# EAGLE board Schematic v30 (EAGLE 9.7.0)
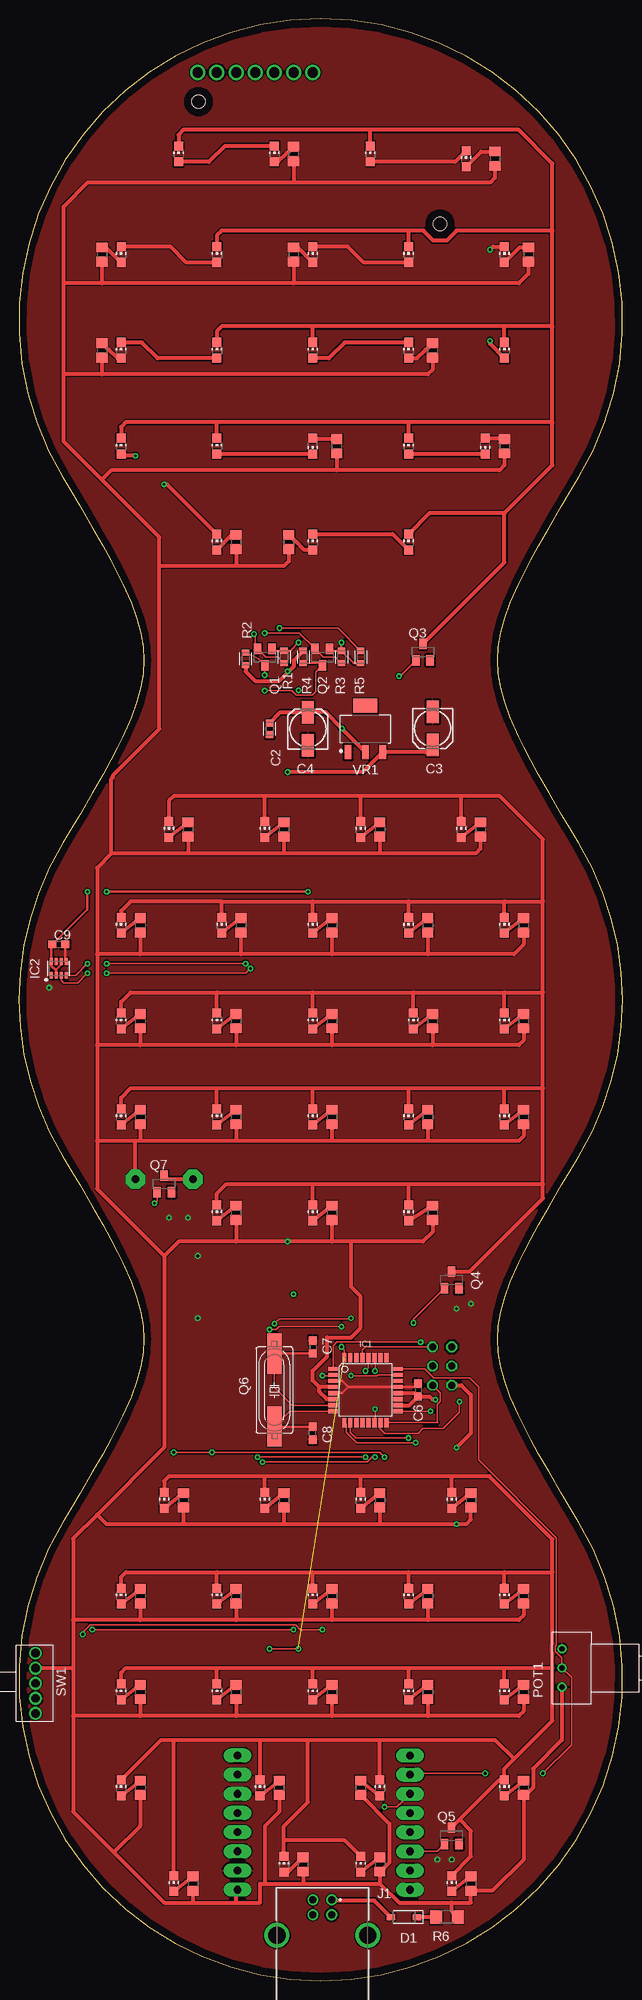
[diagram p0: board, top side]
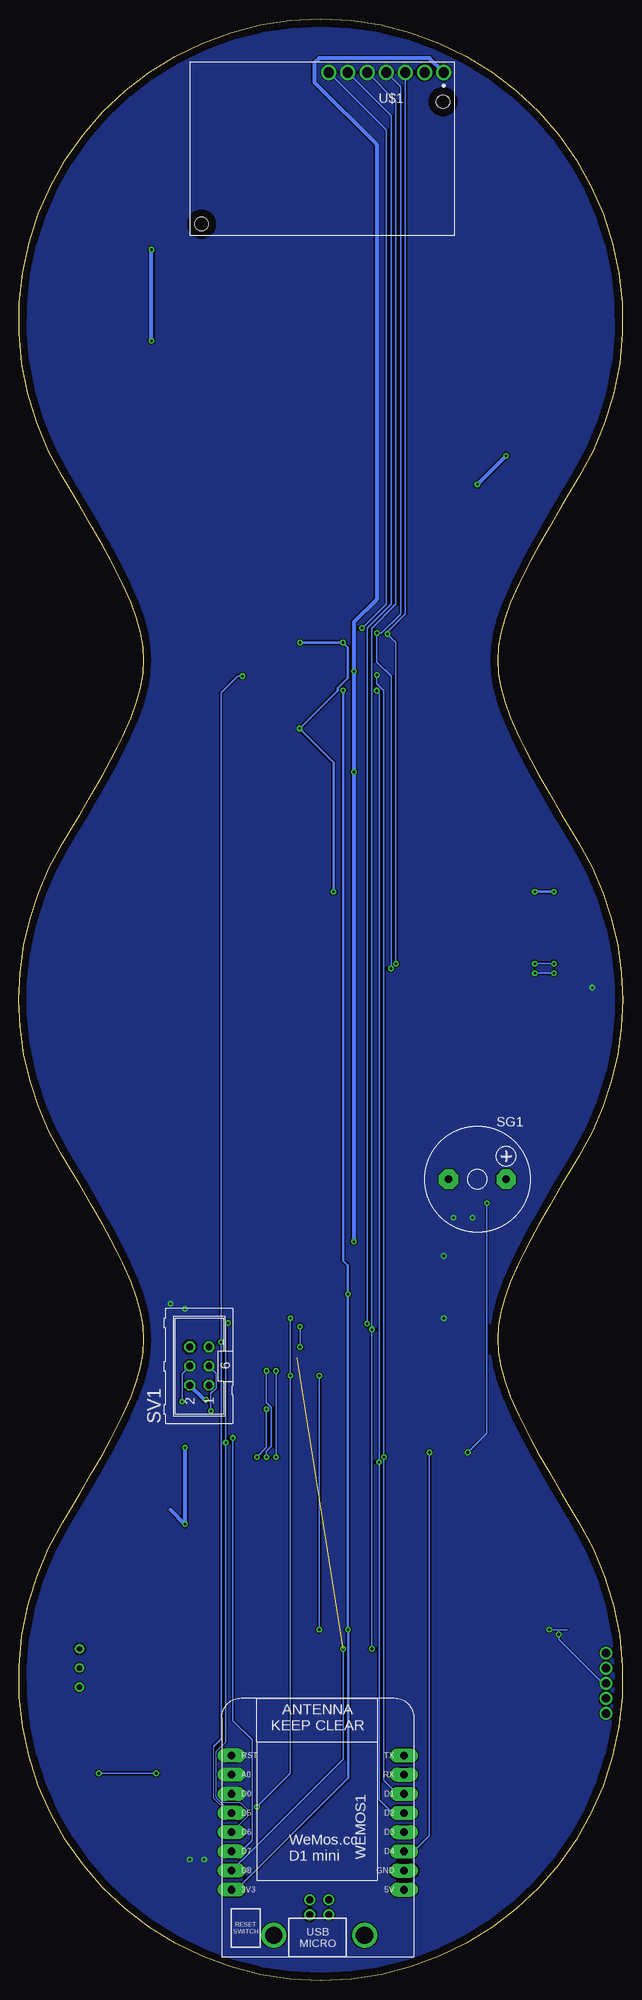
[diagram p1: board, bottom side, seen from below]

Size 80 x 260 mm. Coordinates in mm from the lower left corner, seen from the top.
Outline: 5.8,199.26 7,197.26 8.05,195.51 9.75,192.59 11.1,190.22 12.17,188.25 13.04,186.57 13.76,185.1 14.87,182.61 15.64,180.49 16.16,178.57 16.46,176.77 16.56,175 16.46,173.24 16.16,171.43 15.64,169.51 14.87,167.39 13.76,164.9 13.04,163.43 12.17,161.75 11.09,159.78 9.76,157.41 8.04,154.49 7,152.74 5.8,150.74 arc62 5.8,109.26 7,107.26 8.05,105.51 9.75,102.59 11.1,100.22 12.17,98.25 13.04,96.57 13.76,95.1 14.87,92.61 15.64,90.49 16.16,88.57 16.46,86.77 16.56,85 16.46,83.24 16.16,81.43 15.64,79.51 14.87,77.39 13.76,74.9 13.04,73.43 12.17,71.75 11.09,69.78 9.76,67.41 8.04,64.49 7,62.74 5.8,60.74 arc242 74.2,60.74 73,62.74 71.96,64.49 70.24,67.41 68.91,69.78 67.83,71.75 66.96,73.43 66.24,74.9 65.13,77.39 64.36,79.51 63.84,81.43 63.54,83.24 63.44,85 63.54,86.77 63.84,88.57 64.36,90.49 65.13,92.61 66.24,95.1 66.96,96.57 67.83,98.25 68.9,100.22 70.25,102.59 71.95,105.51 73,107.26 74.2,109.26 arc62 74.2,150.74 73,152.74 71.96,154.49 70.24,157.41 68.91,159.78 67.83,161.75 66.96,163.43 66.24,164.9 65.13,167.39 64.36,169.51 63.84,171.43 63.54,173.24 63.44,175 63.54,176.77 63.84,178.57 64.36,180.49 65.13,182.61 66.24,185.1 66.96,186.57 67.83,188.25 68.9,190.22 70.25,192.59 71.95,195.51 73,197.26 74.2,199.26 arc242 5.8,199.26
Copper layers (1*16): Top 0.035mm / dielectric 1.5mm / Bottom 0.035mm
Design rules "default *": minimum track width 6mil, minimum drill 0.35mm, track to track 6mil, track to pad 6mil, pad to pad 6mil, via to via 6mil, smd to smd 6mil, copper to edge 40mil, drill to drill 6mil, minimum pad ring 10mil, minimum via ring 8mil, stop-mask expansion 4mil, vias tented up to drill 0.4mm, thermal gap 10mil
Net classes: 0 default: width 0.152 mm; 1 low_power: width 0.305 mm; 2 high_power: width 0.508 mm

## Footprints (pad centres in the part's own frame; a part is rotated, then mirrored left to right if it is on the bottom)
CAPC1608X85 = smd 0.921 x 0.97: 1 -0.775,0; 2 0.775,0
153CLV-0505 = smd 3 x 1.6: + 2.2,0; - -2.2,0
C0603 = smd 1.1 x 1: 1 -0.85,0; 2 0.85,0
SOD3715X135 = smd 1.127 x 0.784: 1 -1.722,0; 2 1.722,0
TQFP32-08 = smd 1.27 x 0.559: 1 -4.293,2.8; 2 -4.293,2; 3 -4.293,1.2; 4 -4.293,0.4; 5 -4.293,-0.4; 6 -4.293,-1.2; 7 -4.293,-2; 8 -4.293,-2.8; 17 4.293,-2.8; 18 4.293,-2; 19 4.293,-1.2; 20 4.293,-0.4; 21 4.293,0.4; 22 4.293,1.2; 23 4.293,2; 24 4.293,2.8 | smd 0.559 x 1.27: 9 -2.8,-4.293; 10 -2,-4.293; 11 -1.2,-4.293; 12 -0.4,-4.293; 13 0.4,-4.293; 14 1.2,-4.293; 15 2,-4.293; 16 2.8,-4.293; 25 2.8,4.293; 26 2,4.293; 27 1.2,4.293; 28 0.4,4.293; 29 -0.4,4.293; 30 -1.2,4.293; 31 -2,4.293; 32 -2.8,4.293
SON65P200X250X95-8N = smd 0.879 x 0.382: 1 -0.916,0.975; 2 -0.916,0.325; 3 -0.916,-0.325; 4 -0.916,-0.975; 5 0.916,-0.975; 6 0.916,-0.325; 7 0.916,0.325; 8 0.916,0.975
61400416121 = drill 0.92: 1 1.25,6.74; 2 -1.25,6.74; 3 -1.25,4.74; 4 1.25,4.74 | drill 2.3: S1 -6.02,2.03; S2 6.02,2.03
CHIP-LED0805 = smd 1.2 x 1.2: A 0,-1.05; C 0,1.05
3310C-001-503L = drill 0.71: 1 2.54,0; 2 0,0; 3 -2.54,0
SOT23 = smd 1 x 1.4: 1 -0.95,-1.1; 2 0.95,-1.1; 3 0,1.1
HC49UP = smd 5.334 x 1.93: 1 -4.826,0; 2 4.826,0
RESC1608X60 = smd 0.799 x 0.974: 1 -0.815,0; 2 0.815,0
R1206 = smd 1.6 x 1.803: 1 -1.422,0; 2 1.422,0
R0805 = smd 1.3 x 1.5: 1 -0.95,0; 2 0.95,0
F/CM12P = drill 1.016 pad 2.54 octagon: + 3.81,0; - -3.81,0
ML6 = drill 0.914 octagon: 1 -2.54,-1.27; 2 -2.54,1.27; 3 0,-1.27; 4 0,1.27; 5 2.54,-1.27; 6 2.54,1.27
HDRRAR5W64P200_1X5_1016X736X556B = drill 1.105 pad 1.705: 1 0,0; 2 2,0; 3 4,0; 4 6,0; 5 8,0
HDRV7W80P254_1X7_1778X254X838B = drill 1.331 pad 1.997: 1 0,0; 2 2.54,0; 3 5.08,0; 4 7.62,0; 5 10.16,0; 6 12.7,0; 7 15.24,0 | hole 1.8: 0.1,3.875; 32.1,20.1
SOT230P700X170-4 = smd 1.86 x 0.898: 1 -3.075,2.3; 2 -3.075,0; 3 -3.075,-2.3 | smd 1.86 x 3.189: 4 3.075,0
HDRVR8W64P254_1X8_2032X254X850B = drill 1.016 pad 1.829 long: 3V3 0,0; 5V 0,-22.86; A0 15.24,0; D0 12.7,0; D1 12.7,-22.86; D2 10.16,-22.86; D3 7.62,-22.86; D4 5.08,-22.86; D5 10.16,0; D6 7.62,0; D7 5.08,0; D8 2.54,0; GND 2.54,-22.86; RESET 17.78,0; RX 15.24,-22.86; TX 17.78,-22.86

## Placement (x,y rotation side)
C2  100nF  [CAPC1608X85]  33.22,165.9 270 top
C3  10uF  [153CLV-0505]  54.81,165.97 270 top
C4  10uF  [153CLV-0505]  38.3,165.9 90 top
C6  100nF  [C0603]  52.91,78.27 270 top
C7  22pF  [C0603]  38.94,83.99 270 top
C8  22pF  [C0603]  38.94,72.56 90 top
C9  100nF  [C0603]  5.28,137.33 0 top
D1  1N4448W  [SOD3715X135]  51,8.42 180 top
IC1  ATMEGA328P  [TQFP32-08]  45.92,78.27 0 top
IC2  BMP280  [SON65P200X250X95-8N]  5.28,134.15 90 top
J1  61400416121  [61400416121]  40.21,3.98 0 top
LED_G1  [CHIP-LED0805]  57.35,12.87 0 top
LED_G2  [CHIP-LED0805]  45.29,15.41 0 top
LED_G3  [CHIP-LED0805]  35.13,15.41 0 top
LED_G4  [CHIP-LED0805]  20.52,12.87 0 top
LED_G5  [CHIP-LED0805]  64.34,25.57 0 top
LED_G6  [CHIP-LED0805]  47.83,25.57 0 top
LED_G7  [CHIP-LED0805]  31.95,25.57 0 top
LED_G8  [CHIP-LED0805]  13.54,25.57 0 top
LED_G9  [CHIP-LED0805]  64.34,38.27 0 top
LED_G10  [CHIP-LED0805]  51.64,38.27 0 top
LED_G11  [CHIP-LED0805]  38.94,38.27 0 top
LED_G12  [CHIP-LED0805]  26.24,38.27 0 top
LED_G13  [CHIP-LED0805]  13.54,38.27 0 top
LED_G14  [CHIP-LED0805]  64.34,50.97 0 top
LED_G15  [CHIP-LED0805]  51.64,50.97 0 top
LED_G16  [CHIP-LED0805]  38.94,50.97 0 top
LED_G17  [CHIP-LED0805]  26.24,50.97 0 top
LED_G18  [CHIP-LED0805]  13.54,50.97 0 top
LED_G19  [CHIP-LED0805]  57.35,63.67 0 top
LED_G20  [CHIP-LED0805]  45.29,63.67 0 top
LED_G21  [CHIP-LED0805]  32.59,63.67 0 top
LED_G22  [CHIP-LED0805]  19.25,63.67 0 top
LED_R1  [CHIP-LED0805]  51.64,190.67 0 top
LED_R2  [CHIP-LED0805]  38.94,190.67 0 top
LED_R3  [CHIP-LED0805]  13.54,203.37 0 top
LED_R4  [CHIP-LED0805]  26.24,190.67 0 top
LED_R5  [CHIP-LED0805]  26.24,203.37 0 top
LED_R6  [CHIP-LED0805]  38.94,203.37 180 top
LED_R7  [CHIP-LED0805]  51.64,203.37 0 top
LED_R8  [CHIP-LED0805]  61.8,203.37 180 top
LED_R9  [CHIP-LED0805]  26.24,216.07 0 top
LED_R10  [CHIP-LED0805]  13.54,216.07 0 top
LED_R11  [CHIP-LED0805]  38.94,216.07 0 top
LED_R12  [CHIP-LED0805]  51.64,216.07 0 top
LED_R13  [CHIP-LED0805]  64.34,216.07 0 top
LED_R14  [CHIP-LED0805]  64.34,228.77 0 top
LED_R15  [CHIP-LED0805]  51.64,228.77 0 top
LED_R16  [CHIP-LED0805]  38.94,228.77 0 top
LED_R17  [CHIP-LED0805]  26.24,228.77 0 top
LED_R18  [CHIP-LED0805]  13.54,228.77 0 top
LED_R19  [CHIP-LED0805]  21.16,242.1 0 top
LED_R20  [CHIP-LED0805]  33.86,242.1 0 top
LED_R21  [CHIP-LED0805]  46.56,242.1 0 top
LED_R22  [CHIP-LED0805]  59.26,241.47 0 top
LED_Y1  [CHIP-LED0805]  51.64,101.77 0 top
LED_Y2  [CHIP-LED0805]  38.94,101.77 0 top
LED_Y3  [CHIP-LED0805]  26.24,101.77 0 top
LED_Y4  [CHIP-LED0805]  64.34,114.47 0 top
LED_Y5  [CHIP-LED0805]  51.64,114.47 0 top
LED_Y6  [CHIP-LED0805]  38.94,114.47 0 top
LED_Y7  [CHIP-LED0805]  26.24,114.47 0 top
LED_Y8  [CHIP-LED0805]  13.54,114.47 0 top
LED_Y9  [CHIP-LED0805]  64.34,127.17 0 top
LED_Y10  [CHIP-LED0805]  52.27,127.17 0 top
LED_Y11  [CHIP-LED0805]  38.94,127.17 0 top
LED_Y12  [CHIP-LED0805]  26.24,127.17 0 top
LED_Y13  [CHIP-LED0805]  13.54,127.17 0 top
LED_Y14  [CHIP-LED0805]  64.34,139.87 0 top
LED_Y15  [CHIP-LED0805]  51.64,139.87 0 top
LED_Y16  [CHIP-LED0805]  38.94,139.87 0 top
LED_Y17  [CHIP-LED0805]  26.87,139.87 0 top
LED_Y18  [CHIP-LED0805]  13.54,139.87 0 top
LED_Y19  [CHIP-LED0805]  58.62,152.57 0 top
LED_Y20  [CHIP-LED0805]  45.29,152.57 0 top
LED_Y21  [CHIP-LED0805]  32.59,152.57 0 top
LED_Y22  [CHIP-LED0805]  19.89,152.57 0 top
POT1  3310C-001-503L  [3310C-001-503L]  71.96,41.44 90 top
Q1  NMOSFET  [SOT23]  32.59,175.43 180 top
Q2  NMOSFET  [SOT23]  40.21,175.43 180 top
Q3  NMOSFET  [SOT23]  53.54,176.06 0 top
Q4  NMOSFET  [SOT23]  57.35,92.88 0 top
Q5  NMOSFET  [SOT23]  57.35,19.22 0 top
Q6  16MHz  [HC49UP]  33.86,78.27 90 top
Q7  NMOSFET  [SOT23]  19.25,105.58 0 top
R1  10k  [RESC1608X60]  35.13,175.43 90 top
R2  10k  [RESC1608X60]  30.05,175.19 270 top
R3  10k  [RESC1608X60]  42.75,175.43 90 top
R4  10k  [RESC1608X60]  37.67,175.43 90 top
R5  DNP  [RESC1608X60]  45.29,175.43 90 top
R6  [R1206]  56.72,8.42 0 top
R_G1  [R0805]  59.89,12.87 270 top
R_G2  [R0805]  47.83,15.41 270 top
R_G3  [R0805]  37.67,15.41 270 top
R_G4  [R0805]  23.06,12.87 270 top
R_G5  [R0805]  66.88,25.57 270 top
R_G6  [R0805]  45.29,25.57 270 top
R_G7  [R0805]  34.49,25.57 270 top
R_G8  [R0805]  16.08,25.57 270 top
R_G9  [R0805]  66.88,38.27 270 top
R_G10  [R0805]  54.18,38.27 270 top
R_G11  [R0805]  41.48,38.27 270 top
R_G12  [R0805]  28.78,38.27 270 top
R_G13  [R0805]  16.08,38.27 270 top
R_G14  [R0805]  66.88,50.97 270 top
R_G15  [R0805]  54.18,50.97 270 top
R_G16  [R0805]  41.48,50.97 270 top
R_G17  [R0805]  28.78,50.97 270 top
R_G18  [R0805]  16.08,50.97 270 top
R_G19  [R0805]  59.89,63.67 270 top
R_G20  [R0805]  47.83,63.67 270 top
R_G21  [R0805]  35.13,63.67 270 top
R_G22  [R0805]  21.79,63.67 270 top
R_R1  [R0805]  35.76,190.67 270 top
R_R2  [R0805]  28.78,190.67 270 top
R_R3  [R0805]  42.11,203.37 270 top
R_R4  [R0805]  64.34,203.37 270 top
R_R5  [R0805]  11,216.07 270 top
R_R6  [R0805]  54.81,216.07 270 top
R_R7  [R0805]  67.51,228.77 270 top
R_R8  [R0805]  36.4,228.77 270 top
R_R9  [R0805]  11,228.77 270 top
R_R10  [R0805]  36.4,242.1 270 top
R_R11  [R0805]  63.07,241.47 270 top
R_Y1  [R0805]  54.81,101.77 270 top
R_Y2  [R0805]  41.48,101.77 270 top
R_Y3  [R0805]  28.78,101.77 270 top
R_Y4  [R0805]  66.88,114.47 270 top
R_Y5  [R0805]  54.18,114.47 270 top
R_Y6  [R0805]  41.48,114.47 270 top
R_Y7  [R0805]  28.78,114.47 270 top
R_Y8  [R0805]  16.08,114.47 270 top
R_Y9  [R0805]  66.88,127.17 270 top
R_Y10  [R0805]  54.81,127.17 270 top
R_Y11  [R0805]  41.48,127.17 270 top
R_Y12  [R0805]  28.78,127.17 270 top
R_Y13  [R0805]  16.08,127.17 270 top
R_Y14  [R0805]  66.88,139.87 270 top
R_Y15  [R0805]  54.18,139.87 270 top
R_Y16  [R0805]  41.48,139.87 270 top
R_Y17  [R0805]  29.41,139.87 270 top
R_Y18  [R0805]  16.08,139.87 270 top
R_Y19  [R0805]  61.16,152.57 270 top
R_Y20  [R0805]  47.83,152.57 270 top
R_Y21  [R0805]  35.13,152.57 270 top
R_Y22  [R0805]  22.43,152.57 270 top
SG1  F/CM12P  [F/CM12P]  19.25,106.21 0 bottom
SV1  [ML6]  56.08,81.45 90 bottom
SW1  SWITCH_1X1  [HDRRAR5W64P200_1X5_1016X736X556B]  2.2,43.41 270 top
U$1  SDC30  [HDRV7W80P254_1X7_1778X254X838B]  23.7,252.9 180 bottom
VR1  NCP1117ST33T3G  [SOT230P700X170-4]  45.92,165.9 90 top
WEMOS1  WEMOS_D1_MINI  [HDRVR8W64P254_1X8_2032X254X850B]  51.83,12.05 90 bottom

## Library data of the parts
C2 = Capacitor; CATEGORY: Capacitor
C3 C4 C6-C9 = rcl; SPICEPREFIX: C
D1 = Diode; CATEGORY: Diode; DESCRIPTION: DIODE GEN PURP 75V 250MA SOD123; MANUFACTURER: Micro Commercial Co; SUB-CATEGORY: Rectifier
IC1 = IC_Embedded; CATEGORY: IC_Embedded; MANUFACTURER: Microchip Technologies; MPN: ATmega328P-AU; OPERATING_TEMP: –40 to +105°C; PART_STATUS: Active; SUB-CATEGORY: Microcontroller
IC2 U$1 = SCD30
J1 = Wurth_Connectors_WR-USB; APPLICATION: USB 2.0; DATASHEET-URL: https://www.we-online.com/catalog/datasheet/61400416121.pdf; GERDER: Female; INTERFACE-TYPE: Type B; IR1: 1.5A; MOUNT: THT; PACKAGING: Tray; PART-NUMBER: 61400416121; PINS: 4; TYPE: Horizontal; WORKING-VOLTAGE: 30V(AC)
LED_G1-LED_G22 LED_R1-LED_R22 LED_Y1-LED_Y22 = led
POT1 = Potentiometer_Trimmers; CREATED_BY: PCBLayout.com; DIGIKEY_PARTNO: 3310C-001-503L-ND; MANUFACTURER: Bourns Inc.; MPN: 3310C-001-503L
Q1-Q5 Q7 = Transistor; CATEGORY: Transistor; SUB-CATEGORY: MOSFET; TYPE: N-Channel
Q6 = crystal; OC_FARNELL: unknown; OC_NEWARK: unknown
R1-R5 = Resistor; CATEGORY: Resistor; SUB-CATEGORY: Fixed
R6 R_G1-R_G22 R_R1-R_R11 R_Y1-R_Y22 = rcl; SPICEPREFIX: R
SG1 = buzzer; OC_FARNELL: unknown; OC_NEWARK: unknown
SV1 = con-harting-ml; OC_FARNELL: unknown; OC_NEWARK: unknown
SW1 = Switches
VR1 = IC_Power-Management; CATEGORY: IC_Power-Management; MANUFACTURER: ON Semiconductor; MPN: NCP1117ST33T3G; OPERATING_TEMP: 0 to +125 °C; PART_STATUS: Active; ROHS_COMPLIANT: RoHS3 Compliant; SERIES: NCP1117, NCV1117; SUB-CATEGORY: Voltage Regulator; TYPE: Linear
WEMOS1 = Wemos D1 mini

## Nets
+2V5: C2.1 C4.+ C9.1 IC2.2 IC2.6 IC2.8 Q1.1 Q2.1 R1.2 R3.2 R5.1 VR1.2
+3V3: WEMOS1.3V3
+5V [high_power]: C3.+ C6.2 IC1.4 IC1.6 IC1.18 IC1.20 POT1.3 R2.2 R4.2 R6.2 R_G1.2 R_G2.2 R_G3.2 R_G4.2 R_G5.2 R_G6.2 R_G7.2 R_G8.2 R_G9.2 R_G10.2 R_G11.2 R_G12.2 R_G13.2 R_G14.2 R_G15.2 R_G16.2 R_G17.2 R_G18.2 R_G19.2 R_G20.2 R_G21.2 R_G22.2 R_R1.2 R_R2.2 R_R3.2 R_R4.2 R_R5.2 R_R6.2 R_R7.2 R_R8.2 R_R9.2 R_R10.2 R_R11.2 R_Y1.2 R_Y2.2 R_Y3.2 R_Y4.2 R_Y5.2 R_Y6.2 R_Y7.2 R_Y8.2 R_Y9.2 R_Y10.2 R_Y11.2 R_Y12.2 R_Y13.2 R_Y14.2 R_Y15.2 R_Y16.2 R_Y17.2 R_Y18.2 R_Y19.2 R_Y20.2 R_Y21.2 R_Y22.2 SG1.+ SV1.2 SW1.2 U$1.1 VR1.3 WEMOS1.5V
/RES: IC1.29 SV1.5
BRIGHTNESS: IC1.24 POT1.2 WEMOS1.A0
BUZZ_EN: IC1.2 SW1.3
BUZZER: IC1.14 Q7.1 WEMOS1.D4
GND: C2.2 C3.- C4.- C6.1 C7.1 C8.1 C9.2 IC1.3 IC1.5 IC1.21 IC2.1 IC2.5 IC2.7 J1.4 POT1.1 Q3.2 Q4.2 Q5.2 Q7.2 SV1.6 SW1.4 U$1.2 VR1.1 WEMOS1.GND
GREEN: IC1.10 Q5.1 WEMOS1.D7
MISO: IC1.16 SV1.1
MOSI: IC1.15 SV1.4
N$1: IC2.4 Q1.2 R1.1 U$1.3
N$2: LED_G1.A R_G1.1
N$3: R5.2 U$1.7
N$4: D1.2 J1.1
N$5: LED_R3.A LED_R4.C
N$6: IC2.3 Q2.2 R3.1 U$1.4
N$7: LED_R4.A R_R2.1
N$8: D1.1 R6.1
N$9: LED_R5.A LED_R6.C
N$10: LED_R1.C LED_R3.C LED_R5.C LED_R7.C LED_R9.C LED_R11.C LED_R13.C LED_R15.C LED_R17.C LED_R19.C LED_R21.C Q3.3
N$11: LED_Y1.C LED_Y2.C LED_Y3.C LED_Y4.C LED_Y5.C LED_Y6.C LED_Y7.C LED_Y8.C LED_Y9.C LED_Y10.C LED_Y11.C LED_Y12.C LED_Y13.C LED_Y14.C LED_Y15.C LED_Y16.C LED_Y17.C LED_Y18.C LED_Y19.C LED_Y20.C LED_Y21.C LED_Y22.C Q4.3
N$12: LED_G1.C LED_G2.C LED_G3.C LED_G4.C LED_G5.C LED_G6.C LED_G7.C LED_G8.C LED_G9.C LED_G10.C LED_G11.C LED_G12.C LED_G13.C LED_G14.C LED_G15.C LED_G16.C LED_G17.C LED_G18.C LED_G19.C LED_G20.C LED_G21.C LED_G22.C Q5.3
N$13: LED_Y1.A R_Y1.1
N$14: LED_R1.A LED_R2.C
N$15: LED_R2.A R_R1.1
N$16: LED_R6.A R_R3.1
N$17: C7.2 IC1.7 Q6.2
N$18: LED_R7.A LED_R8.C
N$19: LED_R8.A R_R4.1
N$20: C8.2 IC1.8 Q6.1
N$21: LED_R9.A LED_R10.C
N$22: LED_R10.A R_R5.1
N$24: LED_R11.A LED_R12.C
N$25: LED_R12.A R_R6.1
N$27: LED_R13.A LED_R14.C
N$28: LED_R14.A R_R7.1
N$30: LED_R15.A LED_R16.C
N$31: LED_R16.A R_R8.1
N$32: Q7.3 SG1.-
N$33: LED_R17.A LED_R18.C
N$34: LED_R18.A R_R9.1
N$36: LED_R19.A LED_R20.C
N$37: LED_R20.A R_R10.1
N$39: LED_R21.A LED_R22.C
N$40: LED_R22.A R_R11.1
N$42: LED_Y2.A R_Y2.1
N$44: LED_Y3.A R_Y3.1
N$46: LED_Y4.A R_Y4.1
N$48: LED_Y5.A R_Y5.1
N$50: LED_Y6.A R_Y6.1
N$52: LED_Y7.A R_Y7.1
N$54: LED_Y8.A R_Y8.1
N$56: LED_Y9.A R_Y9.1
N$58: LED_Y10.A R_Y10.1
N$60: LED_Y11.A R_Y11.1
N$62: LED_Y12.A R_Y12.1
N$64: LED_Y13.A R_Y13.1
N$66: LED_Y14.A R_Y14.1
N$68: LED_Y15.A R_Y15.1
N$70: LED_Y16.A R_Y16.1
N$72: LED_Y17.A R_Y17.1
N$74: LED_Y18.A R_Y18.1
N$76: LED_Y19.A R_Y19.1
N$78: LED_Y20.A R_Y20.1
N$80: LED_Y21.A R_Y21.1
N$82: LED_Y22.A R_Y22.1
N$84: LED_G2.A R_G2.1
N$86: LED_G3.A R_G3.1
N$88: LED_G4.A R_G4.1
N$90: LED_G5.A R_G5.1
N$92: LED_G6.A R_G6.1
N$94: LED_G7.A R_G7.1
N$96: LED_G8.A R_G8.1
N$98: LED_G9.A R_G9.1
N$100: LED_G10.A R_G10.1
N$102: LED_G11.A R_G11.1
N$104: LED_G12.A R_G12.1
N$106: LED_G13.A R_G13.1
N$108: LED_G14.A R_G14.1
N$110: LED_G15.A R_G15.1
N$112: LED_G16.A R_G16.1
N$114: LED_G17.A R_G17.1
N$116: LED_G18.A R_G18.1
N$118: LED_G19.A R_G19.1
N$120: LED_G20.A R_G20.1
N$122: LED_G21.A R_G21.1
N$124: LED_G22.A R_G22.1
PWM: IC1.23 U$1.6 WEMOS1.D0
RDY: IC1.32 U$1.5 WEMOS1.D8
RED: IC1.1 Q3.1 WEMOS1.D5
SCK: IC1.17 SV1.3
SCL: IC1.28 Q1.3 R2.1 WEMOS1.D1
SDA: IC1.27 Q2.3 R4.1 WEMOS1.D2
VALUE: IC1.25
YELLOW: IC1.9 Q4.1 WEMOS1.D6

## Tracks (layer width: path | path; a pad name or v marks a point on that pad's centre or on a via)
+2V5  (via drill 0.35, 0.35 pad 0.35)
  Top 0.305: v37.03,177.33 35.94,176.24 R1.2 33.82,176.24 Q1.1 | v42.75,177.33 R3.2 | Q2.1 41.44,176.24 R3.2 | R5.1 44.38,174.61 R3.2 | IC2.2 4.96,134.01 | 4.96,134.01 5.61,134.66 IC2.6 | v9.09,144.31 9.09,141.99 C9.1 4.31,137.2 IC2.8 4.31,134.49 4.79,134.01 4.96,134.01 | v38.3,144.31 v11.63,144.31
  Top 0.508: VR1.2 v42.8,165.95 40.65,168.1 C4.+ 34.65,168.1 C2.1
  Bottom 0.305: v42.75,177.33 v37.03,177.33 36.4,176.7 36.4,172.65 37.75,171.31 37.75,171 v42.8,165.95 38.3,161.46 v38.3,144.31 | v9.09,144.31 v11.63,144.31
+3V3  (via drill 0.35, 0.35 pad 0.35)
  Top 0.203: v9.73,46.52 v36.4,46.52
  Top 0.305: 36.3,90.97 v36.4,90.97
  Bottom 0.203: 7.31,46.52 v9.73,46.52
  Bottom 0.305: WEMOS1.3V3 51.18,12.05 36.35,26.88 36.35,46.52 v36.4,46.52 36.4,81.45 v36.4,90.97 36.4,94.78 37.03,95.42 v37.03,171.01 v37.04,171.01
+5V  (via drill 0.35, 0.35 pad 0.35)
  Top 0.508: C3.+ 53.87,162.83 VR1.3 45.58,160.19 v35.61,160.19 | R_Y19.2 61.16,150.03 60.53,149.39 47.83,149.39 | 47.83,149.39 35.13,149.39 | 35.13,149.39 22.43,149.39 | 22.43,149.39 12.27,149.39 | 12.27,149.39 10.36,147.49 10.36,136.06 | 10.36,136.06 10.36,123.99 | 10.36,123.99 10.36,111.29 | 10.36,111.29 10.36,104.94 19.25,96.05 | 19.25,96.05 19.25,70.65 10.36,61.76 | 10.36,61.76 7.19,58.59 7.19,47.79 | R_Y20.2 47.83,149.39 | R_Y21.2 35.13,149.39 | R_Y22.2 22.43,149.39 | R_Y14.2 66.88,137.33 65.61,136.06 54.18,136.06 | 54.18,136.06 41.48,136.06 | 41.48,136.06 29.41,136.06 | 29.41,136.06 16.08,136.06 | 16.08,136.06 10.36,136.06 | R_Y18.2 16.08,136.06 | R_Y17.2 29.41,136.06 | R_Y16.2 41.48,136.06 | R_Y15.2 54.18,136.06 | R_Y9.2 66.88,124.63 66.24,123.99 54.81,123.99 | 54.81,123.99 41.48,123.99 | 41.48,123.99 28.78,123.99 | 28.78,123.99 16.08,123.99 | 16.08,123.99 10.36,123.99 | R_Y13.2 16.08,123.99 | R_Y12.2 28.78,123.99 | R_Y11.2 41.48,123.99 | R_Y10.2 54.81,123.99 | R_Y4.2 66.88,111.93 66.24,111.29 54.18,111.29 | 54.18,111.29 41.48,111.29 | 41.48,111.29 28.78,111.29 | 28.78,111.29 16.08,111.29 | 16.08,111.29 15.44,111.29 | 15.44,111.29 10.36,111.29 | R_Y8.2 16.08,111.29 | R_Y7.2 28.78,111.29 | R_Y6.2 41.48,111.29 | R_Y5.2 54.18,111.29 | R_Y1.2 54.81,99.23 53.54,97.96 44.02,97.96 | 44.02,97.96 41.48,97.96 | 41.48,97.96 v35.61,97.96 28.78,97.96 | 28.78,97.96 21.16,97.96 19.25,96.05 | R_Y3.2 28.78,97.96 | R_Y2.2 41.48,97.96 | 7.19,47.79 7.19,41.44 | 7.19,41.44 7.19,35.09 | 7.19,35.09 7.19,22.39 12.59,16.99 | 12.59,16.99 19.25,10.33 23.06,10.33 | 23.06,10.33 28.78,10.33 | 28.78,10.33 31.95,10.33 31.95,12.87 32.59,12.87 | 32.59,12.87 37.67,12.87 | 57.35,10.33 59.89,10.33 R_G1.2 62.75,11.92 66.88,16.04 R_G5.2 67.2,24.62 68.15,25.57 68.15,28.11 71.96,31.92 POT1.3
  Top 0.508: 47.83,12.87 R_G2.2 47.9,14.46 49.1,15.65 49.1,20.81 R_G6.2 | R_G3.2 37.67,12.87 | R_G4.2 23.06,10.33 | R_G9.2 66.88,35.73 66.24,35.09 54.18,35.09 | 54.18,35.09 41.48,35.09 | 41.48,35.09 28.78,35.09 | 28.78,35.09 16.08,35.09 | 16.08,35.09 7.19,35.09 | R_G13.2 16.08,35.09 | R_G12.2 28.78,35.09 | R_G11.2 41.48,35.09 | R_G10.2 54.18,35.09 | R_G14.2 66.88,48.43 66.24,47.79 54.18,47.79 | 54.18,47.79 41.48,47.79 | 41.48,47.79 28.78,47.79 | 28.78,47.79 16.08,47.79 | 16.08,47.79 7.19,47.79 | R_G18.2 16.08,47.79 | R_G17.2 28.78,47.79 | R_G16.2 41.48,47.79 | R_G15.2 54.18,47.79 | R_G19.2 59.89,61.13 59.26,60.49 v57.99,60.49 47.83,60.49 | 47.83,60.49 35.13,60.49 | 35.13,60.49 21.79,60.49 | 21.79,60.49 11.63,60.49 10.36,61.76 | R_G22.2 21.79,60.49 | R_G21.2 35.13,60.49 | R_G20.2 47.83,60.49 | R_G7.2 34.49,22.39 32.59,20.49 32.59,12.87 | R_G8.2 16.08,20.49 12.59,16.99 | 28.78,10.33 28.78,11.86 WEMOS1.5V | 12.27,149.39 12.27,159.27 12.45,159.46 12.45,159.62 12.59,159.88 18.62,165.9 18.62,187.49 | 18.62,187.49 18.62,191.3 11,198.92 | 11,198.92 5.92,204 5.92,212.89 | 5.92,212.89 5.92,224.96 | 5.92,224.96 5.92,235.12 9.09,238.29 36.4,238.29 | R_R11.2 63.07,238.93 62.43,238.29 36.4,238.29 | R_R10.2 36.4,238.29 | R_R7.2 67.51,226.23 66.24,224.96 36.4,224.96 | 36.4,224.96 11,224.96 | 11,224.96 5.92,224.96 | R_R8.2 36.4,224.96 | R_R9.2 11,224.96 | R_R6.2 54.81,213.53 54.18,212.89 11,212.89 | 11,212.89 5.92,212.89 | R_R5.2 11,212.89 | 42.11,200.19 63.7,200.19 64.34,200.83 R_R4.2 | 42.11,200.19 12.27,200.19 11,198.92 | R_R3.2 42.11,200.19 | R_R1.2 35.76,188.13 35.13,187.49 28.78,187.49 | 28.78,187.49 18.62,187.49 | R_R2.2 28.78,187.49 | 37.67,12.87 47.83,12.87
  Top 0.508: R6.2 57.35,9.21 57.35,10.33 | SG1.+ 15.44,111.29 | 44.02,97.96 44.02,91.95 45.29,90.68 45.29,86.53 44.02,85.26 40.84,85.26 40.84,82.72 38.94,80.81 38.94,79.54 39.81,78.67 | 47.83,12.87 50.37,10.33 57.35,10.33 | IC1.4 39.81,78.67 | IC1.6 40.77,77.07 39.81,78.04 39.81,78.67 | IC1.20 52.46,77.87 C6.2 | IC1.18 51.76,76.27 C6.2 | C6.2 54.39,77.42 54.81,77 v55.19,77 | SW1.2 2.23,41.44 7.19,41.44 | R4.2 36.4,174.97 36.4,174.16 35.76,173.52 | 35.76,173.52 v35.61,173.52 | R2.2 30.05,173.52 31.32,172.25 34.49,172.25 35.76,173.52 | SV1.2 58.62,78.91 59.89,77.64 59.89,72.56 v57.99,70.65
  Bottom 0.508: U$1.1 25.6,254.8 40.21,254.8 40.84,254.17 40.84,251.63 32.59,243.37 32.59,183.05 35.61,180.02 v35.61,173.52 v35.61,160.19 v35.61,97.96 | 59.89,62.4 v57.99,60.49 v57.99,70.65 | SV1.2 55.45,77 v55.19,77
/RES
  Top 0.203: IC1.29 45.52,83.59 45.92,83.99 SV1.5
BRIGHTNESS  (via drill 0.35)
  Top 0.203: IC1.24 53.75,81.07 54.95,79.87 59.73,79.87 60.91,78.69 60.91,69 71.2,58.71 71.2,44.44 71.1,44.34 71.1,43.62 71.96,42.76 POT1.2 73.23,40.17 73.23,31.28 v69.42,27.47 | WEMOS1.A0 52.01,27.47 v61.8,27.47
  Bottom 0.203: v61.8,27.47 v69.42,27.47
BUZZ_EN  (via drill 0.35)
  Top 0.203: IC1.2 41.54,80.18 v40.21,80.18 | v8.46,45.89 8.46,46.15 9.47,47.15 36.66,47.15 37.29,46.52 v40.21,46.52
  Bottom 0.203: v40.21,80.18 v40.21,46.52 | SW1.3 2.62,39.41 8.46,45.25 v8.46,45.89
BUZZER  (via drill 0.35)
  Top 0.203: Q7.1 18.3,103.36 v17.98,103.04 | v20.52,70.02 v25.6,70.02 47.83,70.02 v48.46,69.38 | v47.19,75.73 47.19,74.05 IC1.14
  Bottom 0.203: v17.98,103.04 17.98,72.56 v20.52,70.02 | v48.46,69.38 47.19,70.65 v47.19,75.73 | WEMOS1.D4 27.69,17.13 25.6,19.22 v25.6,70.02
GND  (via drill 0.35)
  Top 0.305: C9.2 6.13,135.19 IC2.5 | C6.1 52.46,78.67 IC1.21 43.62,78.67 | 43.62,78.67 42.82,79.47 IC1.3 | IC1.5 42.82,77.87 43.62,78.67
  other vias: 57.35,16.04 55.45,16.04 57.99,89.07 59.89,89.7 19.89,101.13 22.43,101.13 23.7,96.05 23.7,87.8 4.01,131.61
  pour Bottom: 7,62.74 5.8,60.74 arc242 74.2,60.74 73,62.74 71.96,64.49 70.24,67.41 68.91,69.78 67.83,71.75 66.96,73.43 66.24,74.9 65.13,77.39 64.36,79.51 63.84,81.43 63.54,83.24 63.44,85 63.54,86.76 63.84,88.57 64.36,90.49 65.13,92.61 66.24,95.1 66.96,96.57 67.83,98.25 68.9,100.22 70.25,102.59 71.95,105.51 73,107.26 74.2,109.26 arc62 74.2,150.74 73,152.74 71.96,154.49 70.24,157.41 68.91,159.78 67.83,161.75 66.96,163.43 66.24,164.9 65.13,167.39 64.36,169.51 63.84,171.43 63.54,173.24 63.44,175 63.54,176.76 63.84,178.57 64.36,180.49 65.13,182.61 66.24,185.1 66.96,186.57 67.83,188.25 68.9,190.22 70.25,192.59 71.95,195.51 73,197.26 74.2,199.26 arc242 5.8,199.26 7,197.26 8.05,195.51 9.75,192.59 11.1,190.22 12.17,188.25 13.04,186.57 13.76,185.1 14.87,182.61 15.64,180.49 16.16,178.57 16.46,176.76 16.56,175 16.46,173.24 16.16,171.43 15.64,169.51 14.87,167.39 13.76,164.9 13.04,163.43 12.17,161.75 11.09,159.78 9.76,157.41 8.04,154.49 7,152.74 5.8,150.74 arc62 5.8,109.26 7,107.26 8.05,105.51 9.75,102.59 11.1,100.22 12.17,98.25 13.04,96.57 13.76,95.1 14.87,92.61 15.64,90.49 16.16,88.57 16.46,86.76 16.56,85 16.46,83.24 16.16,81.43 15.64,79.51 14.87,77.39 13.76,74.9 13.04,73.43 12.17,71.75 11.09,69.78 9.76,67.41 8.04,64.49
  pour Top: 7,62.74 5.8,60.74 arc242 74.2,60.74 73,62.74 71.96,64.49 70.24,67.41 68.91,69.78 67.83,71.75 66.96,73.43 66.24,74.9 65.13,77.39 64.36,79.51 63.84,81.43 63.54,83.24 63.44,85 63.54,86.76 63.84,88.57 64.36,90.49 65.13,92.61 66.24,95.1 66.96,96.57 67.83,98.25 68.9,100.22 70.25,102.59 71.95,105.51 73,107.26 74.2,109.26 arc62 74.2,150.74 73,152.74 71.96,154.49 70.24,157.41 68.91,159.78 67.83,161.75 66.96,163.43 66.24,164.9 65.13,167.39 64.36,169.51 63.84,171.43 63.54,173.24 63.44,175 63.54,176.76 63.84,178.57 64.36,180.49 65.13,182.61 66.24,185.1 66.96,186.57 67.83,188.25 68.9,190.22 70.25,192.59 71.95,195.51 73,197.26 74.2,199.26 arc242 5.8,199.26 7,197.26 8.05,195.51 9.75,192.59 11.1,190.22 12.17,188.25 13.04,186.57 13.76,185.1 14.87,182.61 15.64,180.49 16.16,178.57 16.46,176.76 16.56,175 16.46,173.24 16.16,171.43 15.64,169.51 14.87,167.39 13.76,164.9 13.04,163.43 12.17,161.75 11.09,159.78 9.76,157.41 8.04,154.49 7,152.74 5.8,150.74 arc62 5.8,109.26 7,107.26 8.05,105.51 9.75,102.59 11.1,100.22 12.17,98.25 13.04,96.57 13.76,95.1 14.87,92.61 15.64,90.49 16.16,88.57 16.46,86.76 16.56,85 16.46,83.24 16.16,81.43 15.64,79.51 14.87,77.39 13.76,74.9 13.04,73.43 12.17,71.75 11.09,69.78 9.76,67.41 8.04,64.49
GREEN  (via drill 0.35)
  Top 0.203: WEMOS1.D7 55.42,17.13 Q5.1 | IC1.10 43.92,72.65 44.65,71.92 v51.64,71.92
  Bottom 0.203: v51.64,71.92 51.64,34.46 49.1,31.92 49.1,18.58 50.55,17.13 WEMOS1.D7
MISO
  Top 0.203: 55.6,73.98 55.45,73.98 | 55.45,73.98 IC1.16 | 55.45,73.98 55.45,76.37 55.82,76.74 55.82,77.9 SV1.1
MOSI  (via drill 0.35)
  Top 0.203: IC1.15 47.83,73.88 47.83,73.19 48.46,72.56 52.91,72.56 53.54,73.19 56.25,73.19 58.37,75.31 v58.37,76.75
  Bottom 0.203: SV1.4 58.37,80.43 v58.37,76.75
N$1  (via drill 0.35, 0.35 pad 0.35)
  Top 0.203: R1.1 34.31,175.43 32.74,175.43 Q1.2 31.32,176.85 31.32,178.31 v31.17,178.45 | IC2.4 7.54,133.24 v9.09,134.79 | v11.63,134.79 v30.05,134.79
  Bottom 0.203: U$1.3 28.78,181.14 31.17,178.75 v31.17,178.45 30.05,177.33 v30.05,134.79 | v9.09,134.79 v11.63,134.79
N$2
  Top 0.508: R_G1.1 LED_G1.A
N$3  (via drill 0.35 pad 0.35)
  Top 0.203: R5.2 42.29,179.24 34.54,179.24 v34.52,179.26
  Bottom 0.203: U$1.7 31.32,245.28 31.32,182.46 v34.52,179.26
N$4
  Top 0.508: D1.2 47.09,10.61 41.56,10.61 J1.1
N$5  (via drill 0.35, 0.35 pad 0.35)
  Top 0.508: LED_R4.C 19.67,198.29 v19.25,198.29 | v15.44,202.1 13.76,202.1 LED_R3.A
  Bottom 0.508: v19.25,198.29 v15.44,202.1
N$6  (via drill 0.35, 0.35 pad 0.35)
  Top 0.203: R3.1 41.93,175.43 40.36,175.43 Q2.2 37.18,178.6 v32.57,178.6 | v11.63,133.52 30.05,133.52 30.68,134.14 v30.69,134.14 | IC2.3 5.61,132.56 5.92,132.25 7.82,132.25 v9.09,133.52
  Bottom 0.203: U$1.4 29.41,250.99 29.41,181.14 31.95,178.6 v32.57,178.6 32.57,174.77 30.69,172.89 v30.69,134.14 | v11.63,133.52 v9.09,133.52
N$7
  Top 0.508: LED_R4.A 28.24,191.62 R_R2.1
N$8
  Top 0.508: R6.1 D1.1
N$9
  Top 0.508: LED_R6.C LED_R5.A
N$10
  Top 0.508: Q3.3 64.34,187.96 64.34,194.48 | 64.34,194.48 70.69,200.83 70.69,206.54 | 70.69,206.54 70.69,219.24 | 70.69,219.24 70.69,231.94 | 70.69,231.94 70.69,240.83 66.24,245.28 46.56,245.28 | 46.56,245.28 21.79,245.28 21.16,244.64 LED_R19.C | LED_R21.C 46.56,245.28 | 70.69,231.94 58.01,231.94 56.7,230.63 54.9,230.63 53.58,231.94 51.64,231.94 | 51.64,231.94 26.87,231.94 26.24,231.31 LED_R17.C | LED_R15.C 51.64,231.94 | 70.69,219.24 64.34,219.24 | 64.34,219.24 38.94,219.24 | 38.94,219.24 26.87,219.24 26.24,218.61 LED_R9.C | LED_R11.C 38.94,219.24 | LED_R13.C 64.34,219.24 | 70.69,206.54 51.64,206.54 | 51.64,206.54 26.24,206.54 | 26.24,206.54 14.17,206.54 13.54,205.91 LED_R3.C | LED_R5.C 26.24,206.54 | LED_R7.C 51.64,206.54 | 64.34,194.48 54.4,194.48 LED_R1.C
N$11
  Top 0.508: Q4.3 59.72,93.98 69.37,103.63 69.37,103.65 69.42,103.69 69.42,105.58 | 69.42,105.58 69.42,118.28 | 69.42,118.28 69.42,130.98 | 69.42,130.98 69.42,143.04 | 69.42,143.04 69.42,151.3 63.7,157.01 58.62,157.01 | 58.62,157.01 45.29,157.01 | 45.29,157.01 32.59,157.01 | 32.59,157.01 20.52,157.01 19.89,156.38 LED_Y22.C | LED_Y21.C 32.59,157.01 | LED_Y20.C 45.29,157.01 | LED_Y19.C 58.62,157.01 | LED_Y18.C 13.54,141.77 14.81,143.04 26.87,143.04 | 26.87,143.04 38.94,143.04 | 38.94,143.04 51.64,143.04 | 51.64,143.04 64.34,143.04 | 64.34,143.04 69.42,143.04 | LED_Y14.C 64.34,143.04 | LED_Y15.C 51.64,143.04 | LED_Y16.C 38.94,143.04 | LED_Y17.C 26.87,143.04 | LED_Y13.C 13.54,129.71 14.81,130.98 26.24,130.98 | 38.94,130.98 52.27,130.98 | 52.27,130.98 64.34,130.98 | 64.34,130.98 69.42,130.98 | LED_Y9.C 64.34,130.98 | LED_Y10.C 52.27,130.98 | LED_Y11.C 38.94,130.98 | LED_Y12.C 26.24,130.98 | LED_Y8.C 13.54,117.01 14.81,118.28 26.24,118.28 | 26.24,118.28 38.94,118.28 | 38.94,118.28 51.64,118.28 | 51.64,118.28 64.34,118.28 | 64.34,118.28 69.42,118.28 | LED_Y4.C 64.34,118.28 | LED_Y5.C 51.64,118.28 | LED_Y6.C 38.94,118.28 | LED_Y7.C 26.24,118.28 | LED_Y3.C 26.24,104.31 27.51,105.58 38.94,105.58 | 38.94,105.58 51.64,105.58 | 51.64,105.58 69.42,105.58 | LED_Y1.C 51.64,105.58 | LED_Y2.C 38.94,105.58 | 26.24,130.98 38.94,130.98
N$12
  Top 0.508: Q5.3 58.39,21.35 | 58.39,21.35 63.65,26.62 LED_G5.C 64.34,28.11 65.61,29.38 | 65.61,29.38 70.69,34.46 70.69,41.44 | 57.35,66.84 45.29,66.84 | 45.29,66.84 32.59,66.84 | 32.59,66.84 19.89,66.84 19.25,66.21 LED_G22.C | LED_G21.C 32.59,66.84 | LED_G20.C 45.29,66.84 | LED_G19.C 57.35,66.84 | LED_G18.C 13.54,53.51 14.17,54.14 26.24,54.14 | 26.24,54.14 38.94,54.14 | 38.94,54.14 51.64,54.14 | 51.64,54.14 64.34,54.14 | 64.34,54.14 70.69,54.14 | LED_G14.C 64.34,54.14 | LED_G15.C 51.64,54.14 | LED_G16.C 38.94,54.14 | LED_G17.C 26.24,54.14 | LED_G13.C 13.54,40.81 14.17,41.44 26.24,41.44 | 26.24,41.44 38.94,41.44 | 38.94,41.44 51.64,41.44 | 51.64,41.44 64.34,41.44 | 64.34,41.44 70.69,41.44 | LED_G9.C 64.34,41.44 | LED_G10.C 51.64,41.44 | LED_G11.C 38.94,41.44 | LED_G12.C 26.24,41.44 | LED_G8.C 18.84,31.92 20.52,31.92 | 20.52,31.92 31.95,31.92 | 31.95,31.92 38.3,31.92 | 38.3,31.92 47.83,31.92 | 47.83,31.92 63.07,31.92 65.61,29.38 | LED_G6.C 47.83,31.92 | LED_G7.C 31.95,31.92 | LED_G3.C 35.13,18.58 | 35.13,18.58 35.13,20.49 38.3,23.66 38.3,31.92 | LED_G4.C 20.52,31.92 | LED_G1.C 59.89,16.46 59.89,19.85 58.39,21.35 | LED_G2.C 43.16,18.58 35.13,18.58 | 70.69,54.14 70.69,58.5 62.35,66.84 57.35,66.84 | 70.69,41.44 70.69,43.31 70.59,43.41 70.59,44.55 70.69,44.65 70.69,54.14
N$13
  Top 0.508: R_Y1.1 LED_Y1.A
N$14
  Top 0.508: LED_R2.C 49.54,191.72 LED_R1.A
N$15
  Top 0.508: R_R1.1 36.61,190.77 36.68,190.77 37.84,189.62 LED_R2.A
N$16
  Top 0.508: R_R3.1 39.04,204.32 LED_R6.A
N$17
  Top 0.203: Q6.2 33.86,78.65 36.24,76.27 IC1.7
  Top 0.305: C7.2 33.9,83.14 Q6.2
N$18
  Top 0.508: LED_R8.C LED_R7.A
N$19
  Top 0.508: LED_R8.A 64.24,204.42 R_R4.1
N$20
  Top 0.203: Q6.1 35.88,75.47 IC1.8
  Top 0.305: C8.2 33.9,73.41 Q6.1
N$21
  Top 0.508: LED_R9.A 18.4,215.02 16.3,217.12 LED_R10.C
N$22
  Top 0.508: R_R5.1 11.84,216.17 11.92,216.17 13.07,215.02 LED_R10.A
N$24
  Top 0.508: LED_R12.C 43.16,217.12 41.06,215.02 LED_R11.A
N$25
  Top 0.508: R_R6.1 53.97,216.17 53.9,216.17 52.74,215.02 LED_R12.A
N$27  (via drill 0.35)
  Top 0.508: LED_R13.A 62.43,216.92 v62.43,217.34 | v62.43,229.4 62.85,229.82 LED_R14.C
  Bottom 0.508: v62.43,217.34 v62.43,229.4
N$28
  Top 0.508: LED_R14.A 66.34,229.72 R_R7.1
N$30
  Top 0.508: LED_R15.A 45.7,227.72 43.6,229.82 LED_R16.C
N$31
  Top 0.508: LED_R16.A 36.94,229.72 R_R8.1
N$32
  Top 0.508: SG1.- 19.72,106.21 Q7.3
N$33
  Top 0.508: LED_R17.A 22.21,227.72 20.11,229.82 LED_R18.C
N$34
  Top 0.508: R_R9.1 11.54,229.72 LED_R18.A
N$36
  Top 0.508: LED_R20.C 27.29,243.15 25.19,241.05 LED_R19.A
N$37
  Top 0.508: R_R10.1 35.55,242.21 35.48,242.21 34.32,241.05 LED_R20.A
N$39
  Top 0.508: LED_R22.C 57.79,241.05 LED_R21.A
N$40
  Top 0.508: LED_R22.A 61.26,242.42 R_R11.1
N$42
  Top 0.508: R_Y2.1 LED_Y2.A
N$44
  Top 0.508: R_Y3.1 LED_Y3.A
N$46
  Top 0.508: R_Y4.1 LED_Y4.A
N$48
  Top 0.508: R_Y5.1 LED_Y5.A
N$50
  Top 0.508: R_Y6.1 LED_Y6.A
N$52
  Top 0.508: R_Y7.1 LED_Y7.A
N$54
  Top 0.508: R_Y8.1 LED_Y8.A
N$56
  Top 0.508: R_Y9.1 LED_Y9.A
N$58
  Top 0.508: R_Y10.1 LED_Y10.A
N$60
  Top 0.508: R_Y11.1 LED_Y11.A
N$62
  Top 0.508: R_Y12.1 LED_Y12.A
N$64
  Top 0.508: R_Y13.1 LED_Y13.A
N$66
  Top 0.508: R_Y14.1 LED_Y14.A
N$68
  Top 0.508: R_Y15.1 LED_Y15.A
N$70
  Top 0.508: R_Y16.1 LED_Y16.A
N$72
  Top 0.508: R_Y17.1 LED_Y17.A
N$74
  Top 0.508: R_Y18.1 LED_Y18.A
N$76
  Top 0.508: R_Y19.1 LED_Y19.A
N$78
  Top 0.508: R_Y20.1 LED_Y20.A
N$80
  Top 0.508: R_Y21.1 LED_Y21.A
N$82
  Top 0.508: R_Y22.1 LED_Y22.A
N$84
  Top 0.508: R_G2.1 LED_G2.A
N$86
  Top 0.508: LED_G3.A 35.59,14.36 37.59,16.36 R_G3.1
N$88
  Top 0.508: LED_G4.A R_G4.1
N$90
  Top 0.508: LED_G5.A R_G5.1
N$92
  Top 0.508: R_G6.1 LED_G6.A
N$94
  Top 0.508: LED_G7.A R_G7.1
N$96
  Top 0.508: LED_G8.A R_G8.1
N$98
  Top 0.508: R_G9.1 LED_G9.A
N$100
  Top 0.508: R_G10.1 LED_G10.A
N$102
  Top 0.508: R_G11.1 LED_G11.A
N$104
  Top 0.508: R_G12.1 LED_G12.A
N$106
  Top 0.508: R_G13.1 LED_G13.A
N$108
  Top 0.508: LED_G14.A R_G14.1
N$110
  Top 0.508: LED_G15.A R_G15.1
N$112
  Top 0.508: LED_G16.A R_G16.1
N$114
  Top 0.508: LED_G17.A R_G17.1
N$116
  Top 0.508: LED_G18.A R_G18.1
N$118
  Top 0.508: LED_G19.A R_G19.1
N$120
  Top 0.508: LED_G20.A R_G20.1
N$122
  Top 0.508: LED_G21.A R_G21.1
N$124
  Top 0.508: LED_G22.A R_G22.1
PWM  (via drill 0.35)
  Top 0.203: v33.86,87.07 34.49,87.71 43.93,87.71 v44.02,87.8 | v44.02,80.18 47.46,80.18 47.55,80.27 IC1.23 | WEMOS1.D0 50.46,23.38 50.43,23.38 50.08,23.03 v48.46,23.03
  Bottom 0.203: U$1.6 30.68,247.18 30.68,182.41 33.86,179.24 v33.86,87.07 | v44.02,87.8 v44.02,80.18 44.02,27.47 v48.46,23.03
RDY  (via drill 0.35)  (1 unrouted)
  Top 0.203: v33.22,43.98 v37.03,43.98 | v42.75,86.68 34.49,86.68 34.11,86.3 v33.22,86.3 | IC1.32 43.12,83.61 v42.75,83.99
  Bottom 0.203: U$1.5 30.05,249.09 30.05,182.41 33.24,179.22 33.24,170.69 33.22,170.67 v33.22,43.98 | WEMOS1.D8 50.46,15.96 50.43,15.96 37.03,29.36 v37.03,43.98 | v42.75,83.99 v42.75,86.68
RED  (via drill 0.35, 0.35 pad 0.35)
  Top 0.152: 50.52,172.89 v50.37,172.89
  Top 0.203: Q3.1 50.52,172.89 | IC1.1 41.63,84.14 42.11,84.62 v53.24,84.62
  Bottom 0.152: WEMOS1.D5 52.92,23.3 53.34,23.3 54.19,24.15 54.19,31.07 | 53.21,84.62 v53.24,84.62
  Bottom 0.203: v50.37,172.89 51,172.89 53.21,170.68 53.21,84.62 53.21,32.05 54.19,31.07
SCK  (via drill 0.35)
  Top 0.203: IC1.17 v54.55,75.47
  Bottom 0.203: v54.55,75.47 54.55,77.8 53.85,78.51 53.85,80.48 SV1.3
SCL  (via drill 0.35, 0.35 pad 0.35)
  Top 0.152: v32.57,173.04 32.58,173.02 32.59,173.02
  Top 0.203: IC1.28 46.32,81.21 v45.92,80.81 | v31.62,69.38 v45.92,69.38 | R2.1 31.73,175.19 Q1.3 32.59,173.02
  Bottom 0.152: 31.65,69.38 v31.62,69.38
  Bottom 0.203: WEMOS1.D1 29.87,24.75 31.65,26.53 31.65,69.38 31.65,170.96 32.57,171.88 v32.57,173.04 | v45.92,80.81 v45.92,69.38
SDA  (via drill 0.35, 0.35 pad 0.35)
  Top 0.152: 39.92,174.61 Q2.3
  Top 0.203: R4.1 39.92,174.61 | IC1.27 47.19,82.49 v47.19,80.81 | v47.19,69.38 46.82,69.38 46.18,68.75 32.29,68.75 v32.28,68.74 | Q2.3 39.32,173.44 39.32,170.82 38.85,170.35 36.77,170.35 36.16,170.96 v32.58,170.96
  Bottom 0.152: 32.26,68.75 32.26,68.74 v32.28,68.74 | v32.58,170.96 32.57,170.96
  Bottom 0.203: WEMOS1.D2 30.5,22.21 32.26,23.96 32.26,68.75 32.26,132.25 32.26,170.65 32.57,170.96 | v47.19,69.38 47.19,70.15 46.56,70.78 46.56,75.99 47.19,76.63 v47.19,80.81
YELLOW  (via drill 0.35)
  Top 0.203: Q4.1 52.27,87.65 v52.27,87.16 | IC1.9 43.39,73.71 43.39,72.68 44.79,71.29 v52.58,71.29
  Bottom 0.152: WEMOS1.D6 49.77,21.74 49.77,22.69 50.7,23.61 53.22,23.61 53.89,24.28 53.89,30.31 52.6,31.59 | v52.58,71.29 52.6,71.29
  Bottom 0.203: v52.27,87.16 52.6,86.83 52.6,71.29 52.6,31.59